# EAGLE board MCU Board (EAGLE 7.5.0)
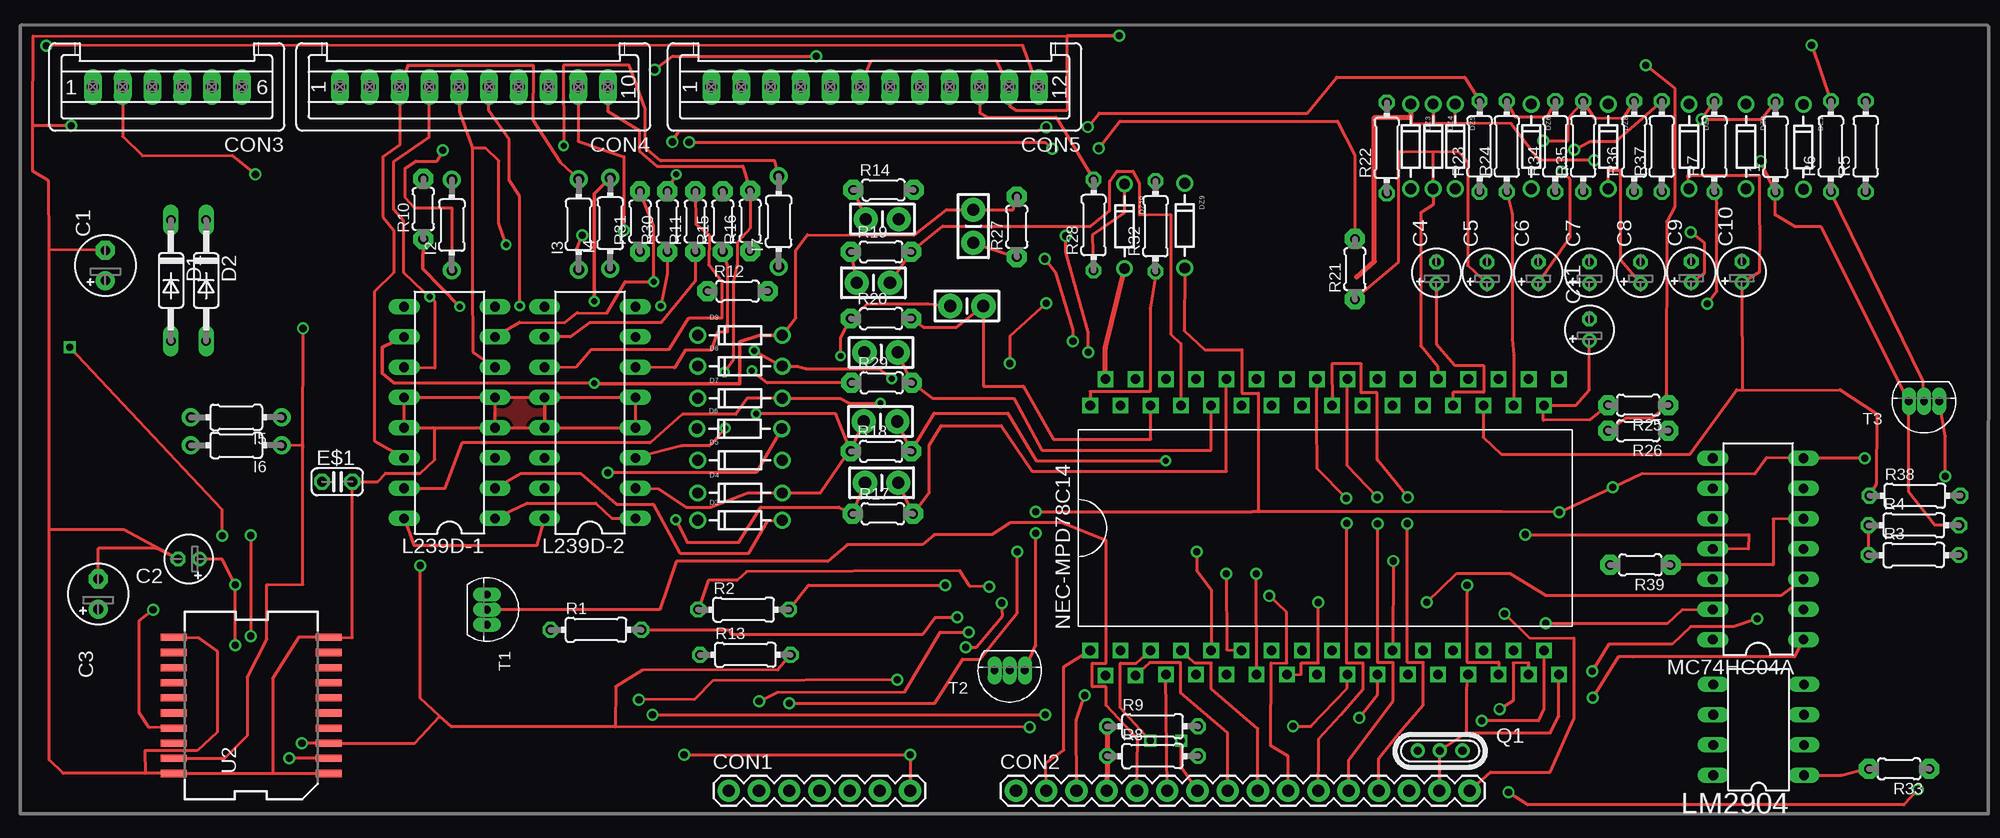
[diagram p0: board, top side]
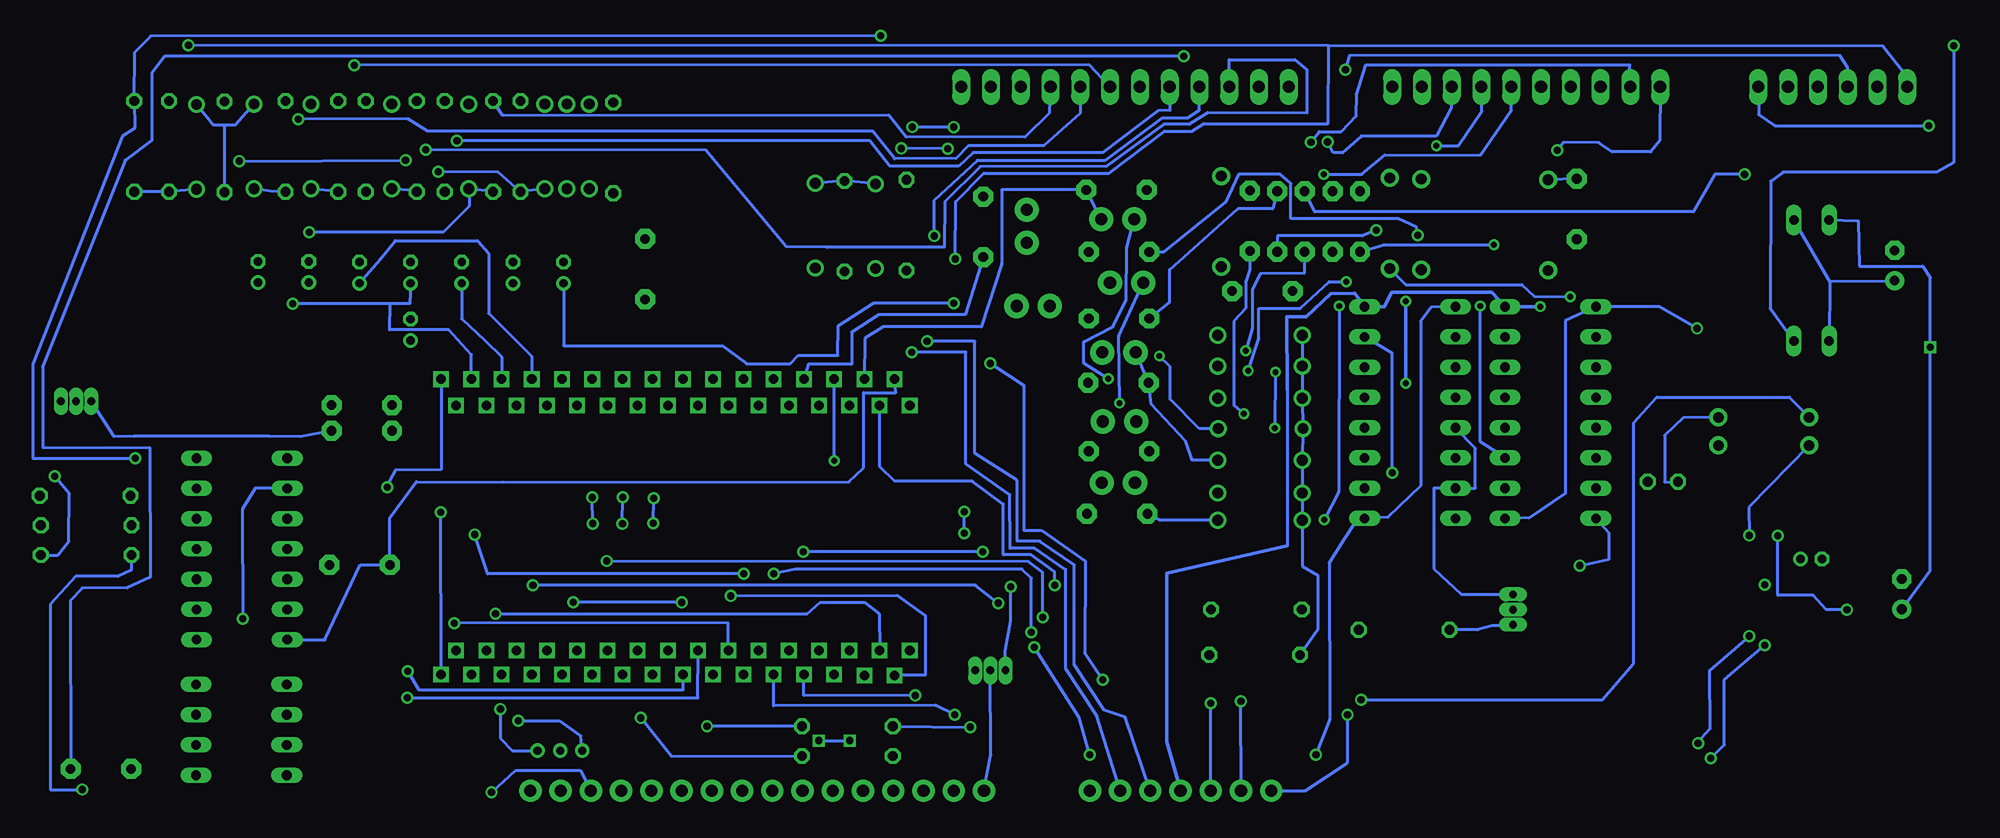
[diagram p1: board, bottom side, seen from below]

No outline drawn. Coordinates in mm, seen from the top.
Copper layers (1*16): Top 0.035mm / dielectric 1.5mm / Bottom 0.035mm
Design rules "default *": minimum track width 10mil, minimum drill 24mil, track to track 4mil, track to pad 4mil, pad to pad 8mil, via to via 8mil, smd to smd 8mil, copper to edge 40mil, drill to drill 8mil, minimum pad ring 10mil, minimum via ring 8mil, stop-mask expansion 4mil, vias tented up to drill 0mil, thermal gap 10mil

## Footprints (pad centres in the part's own frame; a part is rotated, then mirrored left to right if it is on the bottom)
E2,5-5 = drill 0.813 pad 1.6: + -1.27,0 | drill 0.813 pad 1.6 octagon: - 1.27,0
E1,8-4 = drill 0.711 pad 1.168: + -0.889,0 | drill 0.711 pad 1.168 octagon: - 0.889,0
1X07 = drill 1.016 pad 1.88: 1 0,0; 2 2.54,0; 3 5.08,0; 4 7.62,0; 5 10.16,0; 6 12.7,0; 7 15.24,0
1X16 = drill 1.016 pad 1.88: 1 0,0; 2 2.54,0; 3 5.08,0; 4 7.62,0; 5 10.16,0; 6 12.7,0; 7 15.24,0; 8 17.78,0; 9 20.32,0; 10 22.86,0; 11 25.4,0; 12 27.94,0; 13 30.48,0; 14 33.02,0; 15 35.56,0; 16 38.1,0
S06P = drill 1.016 long: 1 6.25,0; 2 3.75,0; 3 1.25,0; 4 -1.25,0; 5 -3.75,0; 6 -6.25,0
S10P = drill 1.016 long: 1 11.25,0; 2 8.75,0; 3 6.25,0; 4 3.75,0; 5 1.25,0; 6 -1.25,0; 7 -3.75,0; 8 -6.25,0; 9 -8.75,0; 10 -11.25,0
S12P = drill 1.016 long: 1 13.75,0; 2 11.25,0; 3 8.75,0; 4 6.25,0; 5 3.75,0; 6 1.25,0; 7 -1.25,0; 8 -3.75,0; 9 -6.25,0; 10 -8.75,0; 11 -11.25,0; 12 -13.75,0
DO35-10 = drill 0.813 long: A 5.08,0; C -5.08,0
DIODE-ZENER = drill 0.9: P$1 -3.556,0; P$2 3.556,0
C025-024X044 = drill 0.813 octagon: 1 -1.27,0; 2 1.27,0
CAP-PTH-SMALL-KIT = drill 1.016 pad 2.032: 1 -1.397,0; 2 1.397,0
0204/7 = drill 0.813 octagon: 1 -3.81,0; 2 3.81,0
TFI0204 = drill 0.9 pad 1.5: 1 -3.81,0; 2 3.81,0
DIL16 = drill 0.813 long: 1 -8.89,-3.81; 2 -6.35,-3.81; 3 -3.81,-3.81; 4 -1.27,-3.81; 5 1.27,-3.81; 6 3.81,-3.81; 7 6.35,-3.81; 8 8.89,-3.81; 9 8.89,3.81; 10 6.35,3.81; 11 3.81,3.81; 12 1.27,3.81; 13 -1.27,3.81; 14 -3.81,3.81; 15 -6.35,3.81; 16 -8.89,3.81
DIP08 = drill 0.813 long: 1 -3.81,-3.81; 2 -1.27,-3.81; 3 1.27,-3.81; 4 3.81,-3.81; 5 3.81,3.81; 6 1.27,3.81; 7 -1.27,3.81; 8 -3.81,3.81
DIL14 = drill 0.813 long: 1 -7.62,-3.81; 2 -5.08,-3.81; 3 -2.54,-3.81; 4 0,-3.81; 5 2.54,-3.81; 6 5.08,-3.81; 7 7.62,-3.81; 8 7.62,3.81; 9 5.08,3.81; 10 2.54,3.81; 11 0,3.81; 12 -2.54,3.81; 13 -5.08,3.81; 14 -7.62,3.81
P64GQ-100-36 = drill 0.8 square: P$1 -10.27,-1.02; P$2 -12.37,-2.29; P$3 -10.27,-3.56; P$4 -12.37,-4.83; P$5 -10.27,-6.1; P$6 -12.31,-7.37; P$7 -10.27,-8.64; P$8 -12.31,-9.91; P$9 -10.27,-11.18; P$10 -12.31,-12.45; P$11 -10.27,-13.72; P$12 -12.31,-14.99; P$13 -10.27,-16.26; P$14 -12.31,-17.53; P$15 -10.27,-18.8; P$16 -12.31,-20.07; P$17 -10.27,-21.34; P$18 -12.31,-22.61; P$19 -10.27,-23.88; P$20 -12.31,-25.15; P$21 -10.27,-26.42; P$22 -12.31,-27.69; P$23 -10.27,-28.96; P$24 -12.31,-30.23; P$25 -10.27,-31.5; P$26 -12.31,-32.77; P$27 -10.27,-34.04; P$28 -12.31,-35.31; P$29 -10.27,-36.58; P$30 -12.31,-37.85; P$31 -10.27,-39.12; P$32 -12.31,-40.39; P$33 12.5,-40.39; P$34 10.3,-39.12; P$35 12.5,-37.85; P$36 10.3,-36.58; P$37 12.5,-35.31; P$38 10.3,-34.04; P$39 12.5,-32.77; P$40 10.3,-31.5; P$41 12.5,-30.23; P$42 10.3,-28.96; P$43 12.5,-27.69; P$44 10.3,-26.42; P$45 12.5,-25.15; P$46 10.3,-23.88; P$47 12.5,-22.61; P$48 10.3,-21.34; P$49 12.5,-20.07; P$50 10.3,-18.8; P$51 12.5,-17.53; P$52 10.3,-16.26; P$53 12.5,-14.99; P$54 10.3,-13.72; P$55 12.5,-12.45; P$56 10.3,-11.18; P$57 12.5,-9.91; P$58 10.3,-8.64; P$59 12.5,-7.37; P$60 10.3,-6.1; P$61 12.5,-4.83; P$62 10.3,-3.56; P$63 12.5,-2.29; P$64 10.3,-1.02
UM5 = drill 0.7 pad 1.2: 1 -1.875,0; 2 -0.027,0; 3 1.875,0
0204/5 = drill 0.813 pad 1.676 octagon: 1 -2.54,0; 2 2.54,0
SOT54 = drill 0.66 pad 1.054 long: 1 1.27,0; 2 0,0; 3 -1.27,0
POWERSO-20 = smd 0.6 x 2.2: 1 -5.715,-6.5; 2 -4.445,-6.5; 3 -3.175,-6.5; 4 -1.905,-6.5; 5 -0.635,-6.5; 6 0.635,-6.5; 7 1.905,-6.5; 8 3.175,-6.5; 9 4.445,-6.5; 10 5.715,-6.5; 11 5.715,6.5; 12 4.445,6.5; 13 3.175,6.5; 14 1.905,6.5; 15 0.635,6.5; 16 -0.635,6.5; 17 -1.905,6.5; 18 -3.175,6.5; 19 -4.445,6.5; 20 -5.715,6.5

## Placement (x,y rotation side)
C1  [E2,5-5]  -62.6,15 90 top
C2  100nF  [E1,8-4]  -55.6,-9.65 180 top
C3  47uF  [E2,5-5]  -63.2,-12.6 90 top
C4  2.2uF  [E1,8-4]  49.2,14.4 90 top
C5  2.2uF  [E1,8-4]  53.45,14.4 90 top
C6  2.2uF  [E1,8-4]  57.75,14.4 90 top
C7  2.2uF  [E1,8-4]  62.05,14.4 90 top
C8  2.2uF  [E1,8-4]  66.35,14.4 90 top
C9  2.2uF  [E1,8-4]  70.6,14.45 90 top
C10  2.2uF  [E1,8-4]  74.85,14.45 90 top
C11  2.2uF  [E1,8-4]  62.05,9.6 90 top
CON1  [1X07]  -10.24,-29.12 0 top
CON2  [1X16]  13.89,-29.12 0 top
CON3  [S06P]  -57.4,30 180 top
CON4  [S10P]  -31.65,30 180 top
CON5  [S12P]  2.05,30 180 top
D1  [DO35-10]  -57.1,13.75 270 top
D2  [DO35-10]  -54.15,13.74 270 top
D3  [DIODE-ZENER]  -9.3,-6.4 0 top
D4  [DIODE-ZENER]  -9.3,-4.1 0 top
D5  [DIODE-ZENER]  -9.3,-1.35 0 top
D6  [DIODE-ZENER]  -9.35,1.3 0 top
D7  [DIODE-ZENER]  -9.3,3.85 0 top
D8  [DIODE-ZENER]  -9.3,6.55 0 top
D9  [DIODE-ZENER]  -9.3,9.15 0 top
DZ1  [DIODE-ZENER]  80.02,24.97 270 top
DZ2  [DIODE-ZENER]  75.2,25 270 top
DZ3  [DIODE-ZENER]  47.04,25 270 top
DZ4  [DIODE-ZENER]  48.92,25 270 top
DZ5  [DIODE-ZENER]  50.78,25 270 top
DZ6  [DIODE-ZENER]  57.15,25 270 top
DZ7  [DIODE-ZENER]  70.41,25 270 top
DZ8  [DIODE-ZENER]  63.63,25 270 top
DZ9  [DIODE-ZENER]  28.05,18.35 270 top
DZ10  [DIODE-ZENER]  23,18.3 270 top
E$1  [C025-024X044]  -43.13,-3.16 0 top
E$8  [CAP-PTH-SMALL-KIT]  2.65,18.9 0 top
E$9  [CAP-PTH-SMALL-KIT]  1.9,13.55 0 top
E$10  [CAP-PTH-SMALL-KIT]  2.55,7.7 0 top
E$11  [CAP-PTH-SMALL-KIT]  2.5,1.9 0 top
E$12  [CAP-PTH-SMALL-KIT]  2.6,-3.25 0 top
E$13  [CAP-PTH-SMALL-KIT]  9.75,11.6 0 top
E$14  [CAP-PTH-SMALL-KIT]  10.3,18.3 90 top
I1  16.5K  [0204/7]  77.68,24.97 90 top
I2  [TFI0204]  -33.5,18.4 90 top
I3  [TFI0204]  -22.85,18.45 90 top
I4  [TFI0204]  -20.2,18.55 90 top
I5  [TFI0204]  -51.61,2.25 180 top
I6  [TFI0204]  -51.61,-0.11 180 top
I7  [TFI0204]  -6.05,18.7 90 top
L239D-1  AirDistMotor & AirCock&BlendMotor  [DIL16]  -33.7,2.65 90 top
L239D-2  AirIntakeMotor & ThreeLevelPressureSW  [DIL16]  -21.9,2.65 90 top
LM2904  LM2904  [DIP08]  76.25,-24 90 top
MC74HC04A  [DIL14]  76.22,-8.8 90 top
NEC-MPD78C14  mPD78C14  [P64GQ-100-36]  19.1,-7.05 90 top
Q1  8MHz  [UM5]  49.5,-25.75 0 top
R1  330  [0204/7]  -21.4,-15.6 0 top
R2  330  [0204/7]  -9,-13.9 0 top
R3  82K  [0204/7]  89.3,-9.32 0 top
R4  12K  [0204/7]  89.3,-6.82 0 top
R5  22K  [0204/7]  85.25,25 90 top
R6  22K  [0204/7]  82.33,25 90 top
R7  22K  [0204/7]  72.55,25 90 top
R8  8.2K  [0204/7]  25.35,-26.2 0 top
R9  8.2K  [0204/7]  25.35,-23.7 0 top
R10  5K7  [0204/5]  -35.9,19.75 90 top
R11  8K2  [0204/5]  -13.05,18.7 90 top
R12  8K2  [0204/5]  -9.5,12.85 0 top
R13  180  [0204/7]  -8.85,-17.7 0 top
R14  22K  [0204/5]  2.75,21.35 0 top
R15  8K2  [0204/5]  -10.75,18.7 90 top
R16  8K2  [0204/5]  -8.45,18.75 90 top
R17  22K  [0204/5]  2.7,-5.85 0 top
R18  22K  [0204/5]  2.55,-0.6 0 top
R19  22K  [0204/5]  2.55,16.15 0 top
R20  22K  [0204/5]  2.55,10.55 0 top
R21  22K  [0204/5]  42.35,14.7 90 top
R22  8K2  [0204/7]  45.02,24.88 90 top
R23  22K  [0204/7]  52.82,25 90 top
R24  22K  [0204/7]  55.11,25 90 top
R25  22K +/-5%  [0204/5]  66.15,3.27 180 top
R26  1500  [0204/5]  66.15,1.12 180 top
R27  22K  [0204/5]  13.95,18.25 90 top
R28  22K  [0204/7]  20.4,18.4 90 top
R29  22K  [0204/5]  2.6,5.15 0 top
R30  8K2  [0204/5]  -15.4,18.7 90 top
R31  8K2  [0204/5]  -17.7,18.7 90 top
R32  8K2  [0204/7]  25.6,18.3 90 top
R33  22K  [0204/5]  88.06,-27.28 180 top
R34  3.92k  [0204/7]  59.18,25 90 top
R35  22K  [0204/7]  61.52,25 90 top
R36  3.92K  [0204/7]  65.8,25 90 top
R37  22.1K  [0204/7]  68.12,25 90 top
R38  12K  [0204/7]  89.39,-4.34 0 top
R39  22K  [0204/5]  66.32,-10.14 180 top
T1  LCD Vel.  [SOT54]  -30.55,-13.9 270 top
T2  LCD Temp  [SOT54]  13.35,-19 180 top
T3  Bright Ctrl.  [SOT54]  90.15,3.6 180 top
U2  ST-L4947PD  [POWERSO-20]  -50.35,-21.95 90 top

## Library data of the parts
C1-C3 D1 D2 R10-R12 R14-R21 R25-R27 R29-R31 R33 R39 = adafruit
C4-C11 = ref-packages
CON1 CON2 = SparkFun-Connectors
CON3-CON5 = con-amp-mt
D3-D9 DZ1-DZ10 = SparkFun-DiscreteSemi
E$1 I1-I7 R5-R7 R22-R24 R28 R32 R34-R37 = rcl
E$8-E$11 E$13 E$14 = SparkFun-Passives
E$12 = SparkFun-Capacitors
L239D-1 L239D-2 = texas
LM2904 = motorola-sensor-driver
MC74HC04A = 74ac-logic
NEC-MPD78C14 = SOT185-1
Q1 = crystal
R1-R4 R8 R9 R13 R38 = resistor
T1-T3 = NXP_60_26022015
U2 = st-microelectronics

## Nets
[CON1.1]=MPD78C14.PB1->PCF2112_LCD_DRIVER.CLOCK_BUSTER: CON1.1 NEC-MPD78C14.P$10
[CON1.2]=MPD78C14.PB2->PCF2112_LCD_DRIVER.DATA: CON1.2 NEC-MPD78C14.P$11
[CON1.3]=MPD78C14.PB0->PCF2112_LCD_DRIVER.DATA_ENABLE: CON1.3 NEC-MPD78C14.P$9
[CON1.4][4.1]LCD_BULB_+12V-L293D_HBRIDGE_DRIVER.VCC2: CON1.4 L239D-1.8 L239D-2.8 R10.1
[CON1.6][CON5.4]=LUZ_PRINCIPAL_GND: CON1.6 CON5.4
[CON2.1]=NPN_LCD_TEMP_BULB.COLLECTOR->GND: CON2.1 T2.2
[CON2.2]=MPD78C14.PA0->KEYPAD.ROW0: CON2.2 NEC-MPD78C14.P$1
[CON2.3]=MPD78C14.PA7->KEYPAD.COL3: CON2.3 NEC-MPD78C14.P$8
[CON2.5]=NPN_LCD_SPEED_BULB.COLLECTOR->GND: CON2.5 T1.2
[CON2.6]=MPD78C14.PA5->KEYPAD.COL1: CON2.6 NEC-MPD78C14.P$6
[CON2.7]=MPD78C14.PA4->KEYPAD.COL0: CON2.7 NEC-MPD78C14.P$5
[CON2.8]=MPD78C14.PA3->KEYPAD.ROW3: CON2.8 NEC-MPD78C14.P$4
[CON2.9]=MPD78C14.PA6->KEYPAD.COL2: CON2.9 NEC-MPD78C14.P$7
[CON2.10]=MPD78C14.PA1->KEYPAD.ROW1: CON2.10 NEC-MPD78C14.P$2
[CON2.10]=MPD78C14.PF2->MM5481_LED_DRIVER.DATA_ENABLED: CON2.11 NEC-MPD78C14.P$49
[CON2.10][CON3.1]=NPN_BRIGHT_CTL.COLLECTOR->MM5481M_LED_DRIVER.BRIGHT_CONTROL(LUZ_PPL_V+): CON2.14 R3.1 R4.1
[CON2.12]=MPD78C14.PF0->MM5481_LED_DRIVER.DATA: CON2.12 NEC-MPD78C14.P$47
[CON2.13]=MPD78C14.PF1->MM5481_LED_DRIVER.CLOCK_IN: CON2.13 NEC-MPD78C14.P$48
[CON2.16]=MPD78C14.PA2->KEYPAD.ROW2: CON2.16 NEC-MPD78C14.P$3
[CON3.1]->[CON1.5]=LUZ_PRINCIPAL_+12V: CON1.5 CON3.1 R6.2
[CON3.2]=L239D.3Y->THREE_LVL_PRESSURE_SW: CON3.2 L239D-2.11 R11.2
[CON3.3]=ELECTRONIC_SPEED_REG<-LM2904.1OUT: CON3.3 R33.1
[CON4.1]=LUZ_LCD_+12V: CON4.1 I2.1
[CON4.2]=COCK_BLEND_MOTOR_POT->MPD78C14.AN7: CON4.2 R21.2
[CON4.3]=L239D.4Y->AIR_COCK_BLEND_MOTOR_NEG-: CON4.3 I3.2 L239D-1.14
[CON4.4]=L239D.3Y->AIR_COCK_BLEND_MOTOR_POS+: CON4.4 I4.1 L239D-1.11
[CON4.5]=L239D.2Y->AIR_DISTR_MOTOR_NEG-: CON4.5 L239D-1.6 R31.1
[CON4.6]=L239D.1Y->AIR_DISTR_MOTOR_POS+: CON4.6 L239D-1.3 R30.2
[CON4.7]=AIR_COCK_BLEND_MOTOR-AIR_DIST_MOTOR-POT(+5V): CON4.7 I7.2
[CON4.8]=AIR_DISTR_MOTOR_POT->MPD78C14.AN3: CON4.8 R23.2
[CON4.9]=L239D.2Y->AIR_INTAKE_MOTOR_POS+: CON4.9 L239D-2.6 R15.1
[CON4.10]=L239D.1Y->AIR_INTAKE_MOTOR_NEG-: CON4.10 L239D-2.3 R16.2
[CON5.3]=ELECTR_SPEED_REG_NTC->MPD78C14.AN4: CON5.3 R37.2
[CON5.5]=->TOP_BLENDED_AIR_TEMP_SENSOR->MPD78C14.AN5: CON5.5 R35.2 R36.2
[CON5.6]=COMMON_GND: C1.- C2.- C3.- CON2.15 CON3.6 CON5.6 CON5.11 DZ9.P$2 E$1.2 L239D-1.4 L239D-1.5 L239D-1.12 L239D-1.13 L239D-2.4 L239D-2.5 L239D-2.12 L239D-2.13 L239D-2.15 MC74HC04A.7 NEC-MPD78C14.P$26 NEC-MPD78C14.P$32 NEC-MPD78C14.P$33 Q1.2 R5.2 T1.3 T2.3 U2.1 U2.10 U2.11 U2.20
[CON5.9]=->BOTTOM_BLENDED_AIR_TEMP_SENSOR->MPD78C14.AN2: CON5.9 R24.2 R34.2
[CON5.10]=RADIO(+12V)->MPD78C14.VDD(+5V): CON5.10 R28.2
[CON5.12]=POWER_SUPPLIE(12V+): CON5.12 D2.A
CON5.7[BL].PASSENGER_COMPARTMENT_TEMP_SENSOR->MPD78C14.AN0: CON5.7 R25.1 R26.2
CON5.8[B].OUTSIDE_MIRROR_TEMP_SENSOR->MPD78C14.AN1: CON5.8 I1.2 R7.2
L239D.A1<-MPD78C14.PD0: D3.P$2 E$12.1 L239D-1.2 R17.1 R30.1
L239D.A1<-MPD78C14.PD4: D4.P$2 E$11.1 L239D-2.2 R16.1 R18.1
L239D.A2<-MPD78C14.PD1: D5.P$2 E$10.1 L239D-1.7 R29.1 R31.2
L239D.A2<-MPD78C14.PD2: E$14.1 NEC-MPD78C14.P$57 R27.1
L239D.A2<-MPD78C14.PD5: D6.P$2 E$13.1 L239D-2.7 R15.2 R20.1
L239D.A3<-MPD78C14.PD2: D9.P$2 E$14.2 I4.2 L239D-1.10 R27.2
L239D.A3<-MPD78C14.PD6: D8.P$2 E$8.1 L239D-2.10 R11.1 R14.1
L239D.A4<-MPD78C14.PD3: D7.P$2 E$9.1 I3.1 L239D-1.15 R19.1
L4947_VOLTAGE_REG.DELAYCAP: C2.+ U2.2
L4947_VOLTAGE_REG.RESET(+5V): CON1.7 I6.1 L239D-1.1 L239D-1.9 L239D-2.1 L239D-2.9 NEC-MPD78C14.P$28 U2.19
L4947_VOLTAGE_REG.VIN: C3.+ D1.C U2.17
L4947_VOLTAGE_REG.VOUT(+5V): CON2.4 I6.2 L239D-1.16 L239D-2.16 R8.1 R9.1 R13.2 U2.3
L4947_VOLTAGE_REG.VOUT->MPD78C14.STOP: DZ1.P$1 DZ2.P$1 DZ3.P$1 DZ4.P$1 DZ5.P$1 I1.1 R4.2 R26.1 T3.1
LM2904.1OUT: LM2904.1 R33.2
MPD78C14.AN0: C11.+ NEC-MPD78C14.P$34 R25.2
MPD78C14.AN1: C7.+ DZ2.P$2 NEC-MPD78C14.P$35 R7.1
MPD78C14.AN2: C9.+ DZ6.P$2 NEC-MPD78C14.P$36 R24.1
MPD78C14.AN3: C6.+ DZ5.P$2 NEC-MPD78C14.P$37 R23.1
MPD78C14.AN4: C10.+ DZ7.P$2 NEC-MPD78C14.P$38 R37.1 R38.1
MPD78C14.AN5: C8.+ DZ8.P$2 NEC-MPD78C14.P$39 R35.1
MPD78C14.AN6: C4.+ I5.2 NEC-MPD78C14.P$40
MPD78C14.AN7: C5.+ DZ4.P$2 NEC-MPD78C14.P$41 R21.1
MPD78C14.PB3->MC74HC04A.A5: MC74HC04A.11 NEC-MPD78C14.P$12
MPD78C14.PB4->MC74HC04A.A6: MC74HC04A.13 NEC-MPD78C14.P$13
MPD78C14.PB5->MC74HC04A.A2: MC74HC04A.3 NEC-MPD78C14.P$14
MPD78C14.PB6->MC74HC04A.A1: MC74HC04A.1 NEC-MPD78C14.P$15
MPD78C14.PB7->MC74HC04A.A4: MC74HC04A.9 NEC-MPD78C14.P$16
MPD78C14.PC4->NPN_LCD_SPEED_BULB.BASE: NEC-MPD78C14.P$21 R1.2
MPD78C14.PD0->L239D.A1: E$12.2 NEC-MPD78C14.P$55 R17.2
MPD78C14.PD1->L239D.A2: E$10.2 NEC-MPD78C14.P$56 R29.2
MPD78C14.PD3->L239D.A4: E$9.2 NEC-MPD78C14.P$58 R19.2
MPD78C14.PD4->L239D.A1: E$11.2 NEC-MPD78C14.P$59 R18.2
MPD78C14.PD5->L239D.A2: E$13.2 NEC-MPD78C14.P$60 R20.2
MPD78C14.PD6->L239D.A3: E$8.2 NEC-MPD78C14.P$61 R14.2
MPD78C14.PD7->NPN_LCD_TEMP_BULB.BASE: NEC-MPD78C14.P$62 R2.2
MPD78C14.VDD(+5V)->MC74HC04A.A3: MC74HC04A.5 R39.1
MPD78C14.VDD(+5V)<-RADIO(+12V): NEC-MPD78C14.P$64 R32.1
MPD78C14.X1: NEC-MPD78C14.P$30 Q1.3
MPD78C14.X2: NEC-MPD78C14.P$31 Q1.1
NPN_BRIGHT_CTL.COLLECTOR(LUZ_PPL_V+): R3.2 T3.3
NPN_LCD_SPEED_BULB.BASE: R1.1 T1.1
NPN_LCD_TEMP_BULB.BASE: R2.1 T2.1
PC1/RXD: NEC-MPD78C14.P$18 R9.2
PC3/INT2: NEC-MPD78C14.P$20 R8.2
RADIO(+12V)->MPD78C14.VDD(+5V): DZ9.P$1 DZ10.P$1 R28.1 R32.2
RADIO(+12V)->MPD78C14.VDD(+5V)->MPD78C14.STOP: DZ10.P$2 MC74HC04A.14 NEC-MPD78C14.P$63 R39.2
S$4: DZ1.P$2 R5.1 R6.1 T3.2
S$7: C1.+ D1.A D2.C
S$8: E$1.1 I5.1
S$10: D3.P$1 D4.P$1 D5.P$1 D6.P$1 D7.P$1 D8.P$1 D9.P$1 R13.1
S$28: I2.2 R10.2

## Tracks (layer width: path | path; a pad name or v marks a point on that pad's centre or on a via)
[CON1.1]=MPD78C14.PB1->PCF2112_LCD_DRIVER.CLOCK_BUSTER  (via drill 0.6)
  Top 0.254: v-16.65,-22.73 v16.35,-22.73
  Bottom 0.254: CON1.1 -13.1,-29.1 -16.65,-26.75 v-16.65,-22.73 | v16.35,-22.73 17.99,-21.94 31.55,-21.99 NEC-MPD78C14.P$10
[CON1.2]=MPD78C14.PB2->PCF2112_LCD_DRIVER.DATA  (via drill 0.6)
  Top 0.254: v-7.7,-21.59 -6.16,-20.82 4.55,-20.81 7.5,-15.8 v9.9,-15.8 | v31.53,-10.9 31.57,-17.27 NEC-MPD78C14.P$11
  Bottom 0.254: CON1.2 v-7.7,-21.59 | v9.9,-15.8 9.9,-11.25 10.7,-10.5 29.75,-10.5 v31.53,-10.9
[CON1.3]=MPD78C14.PB0->PCF2112_LCD_DRIVER.DATA_ENABLE  (via drill 0.6)
  Top 0.254: v-5.15,-21.77 7.05,-21.77 8.3,-19.8 9.4,-18.05 10.85,-18.05 14,-14.15 v14,-9.05 | v29.05,-9.05 29.05,-10.6 30.3,-12.25 NEC-MPD78C14.P$9
  Bottom 0.254: CON1.3 v-5.15,-21.77 | v14,-9.05 v29.05,-9.05
[CON1.4][4.1]LCD_BULB_+12V-L293D_HBRIDGE_DRIVER.VCC2  (via drill 0.5 pad 0.25)
  Top 0.305: R10.1 -35.95,14.75 v-32.85,11.55
  Bottom 0.254: -11.6,4.55 -11.6,-8.55
  Bottom 0.305: -11.6,4.55 -11.55,10.7 -13.2,10.7 -15.25,12.65 -17.24,12.66 L239D-2.8 -19.75,11.55 -20.35,12.75 -28.75,12.75 L239D-1.8 v-32.85,11.55 | -11.6,-8.55 -1.46,-10.85 -1.48,-25 CON1.4
[CON1.6][CON5.4]=LUZ_PRINCIPAL_GND  (via drill 0.6)
  Top 0.254: v19.94,7.71 19.96,9.38 18.07,16.16 v18.05,17.48
  Bottom 0.254: CON1.6 4.4,-22.8 7,-18.85 7,-10.55 9.6,-8.75 11.7,-8.75 11.7,-4.25 15.4,-1.65 15.4,7.73 v19.94,7.71 | v18.05,17.48 18.04,20.49 14.42,23.86 3.69,23.86 -1.08,27.39 -3.24,27.39 -4.21,28.06 -4.2,29.75 CON5.4
[CON2.1]=NPN_LCD_TEMP_BULB.COLLECTOR->GND
  Bottom 0.254: CON2.1 13.3,-26.1 T2.2
[CON2.2]=MPD78C14.PA0->KEYPAD.ROW0
  Top 0.254: CON2.2 16.4,-26.8 17.9,-25.7 17.9,-18.7 NEC-MPD78C14.P$1
[CON2.3]=MPD78C14.PA7->KEYPAD.COL3  (via drill 0.6)
  Top 0.254: CON2.3 18.95,-23.2 v19.66,-21.11
  Bottom 0.254: v19.66,-21.11 29.01,-21.12 NEC-MPD78C14.P$8
[CON2.5]=NPN_LCD_SPEED_BULB.COLLECTOR->GND
  Top 0.254: CON2.5 24.1,-24.8 21.45,-21.95 21.45,-20.4 20.3,-20.4 20.3,-18.4 21.45,-18.4 21.45,-8.1 17.7,-6.59 13.4,-6.59 11.85,-7.6 7,-7.6 6,-8.45 -0.3,-8.45 -1.95,-9.85 -14.65,-9.85 -16.05,-13.9 T1.2
[CON2.6]=MPD78C14.PA5->KEYPAD.COL1
  Top 0.254: CON2.6 NEC-MPD78C14.P$6
[CON2.7]=MPD78C14.PA4->KEYPAD.COL0  (via drill 0.6)
  Top 0.254: CON2.7 27.75,-27.15 v27.75,-24.9 | v25.15,-24.9 22.65,-22.15 22.65,-18.4 24,-18.4 NEC-MPD78C14.P$5
  Bottom 0.254: v27.75,-24.9 v25.15,-24.9
[CON2.8]=MPD78C14.PA3->KEYPAD.ROW3
  Top 0.254: CON2.8 31.65,-24.25 27.7,-20.9 27.7,-18.35 25.1,-18.35 NEC-MPD78C14.P$4
[CON2.9]=MPD78C14.PA6->KEYPAD.COL2
  Top 0.254: CON2.9 34.2,-23.9 30.3,-20.55 30.3,-18.4 28.9,-18.4 NEC-MPD78C14.P$7
[CON2.10]=MPD78C14.PA1->KEYPAD.ROW1  (via drill 0.6)
  Top 0.254: CON2.10 36.75,-26.2 35.3,-25.35 35.31,-18.39 36.63,-18.37 36.62,-14.1 v35.15,-12.75
  Bottom 0.254: v35.15,-12.75 21.2,-12.7 18.8,-14.4 18.8,-19.4 NEC-MPD78C14.P$2
[CON2.10]=MPD78C14.PF2->MM5481_LED_DRIVER.DATA_ENABLED  (via drill 0.6)
  Top 0.254: CON2.11 39.3,-26 39.3,-24.75 41.15,-22.75 43.05,-20.55 43.05,-18.4 41.65,-18.4 v41.65,-6.64 | v41.63,-4.54 39.18,-2.05 39.15,1.95 39.15,4.6 NEC-MPD78C14.P$49
  Bottom 0.254: v41.65,-6.64 v41.63,-4.54
[CON2.10][CON3.1]=NPN_BRIGHT_CTL.COLLECTOR->MM5481M_LED_DRIVER.BRIGHT_CONTROL(LUZ_PPL_V+)  (via drill 0.6)
  Top 0.254: R3.1 R4.1 | v89.63,-29.01 88.45,-30.31 56.86,-30.31 v55.25,-29.25
  Bottom 0.254: R3.1 85.49,-10.58 86.61,-11.11 90.18,-11.11 92.3,-13.43 92.31,-29.03 v89.63,-29.01 | v55.25,-29.25 53.2,-27.4 47.8,-27.4 CON2.14
[CON2.12]=MPD78C14.PF0->MM5481_LED_DRIVER.DATA  (via drill 0.6)
  Top 0.254: CON2.12 41.85,-26.5 45.55,-21.55 45.55,-18.35 44.25,-18.35 v44.25,-6.68 | v44.23,-4.45 41.72,-1.8 41.7,0.72 41.7,4.3 NEC-MPD78C14.P$47
  Bottom 0.254: v44.25,-6.68 v44.23,-4.45
[CON2.13]=MPD78C14.PF1->MM5481_LED_DRIVER.CLOCK_IN  (via drill 0.6)
  Top 0.254: CON2.13 44.35,-26.4 46.05,-24.3 48.1,-21.9 48.1,-18.35 46.75,-18.35 v46.75,-6.67 | v46.78,-4.48 44.21,-1.32 44.21,4.3 42.9,4.3 42.9,6.75 40.41,6.75 NEC-MPD78C14.P$48
  Bottom 0.254: v46.75,-6.67 v46.78,-4.48
[CON2.16]=MPD78C14.PA2->KEYPAD.ROW2  (via drill 0.6)
  Top 0.254: CON2.16 53.75,-27.55 58.75,-27.55 60.73,-23.1 60.74,-16.29 57,-16.27 v54.91,-14.24
  Bottom 0.254: v54.91,-14.24 28.73,-14.26 27.65,-13.3 23.95,-13.3 22.7,-14.25 NEC-MPD78C14.P$3
[CON3.1]->[CON1.5]=LUZ_PRINCIPAL_+12V  (via drill 0.6)
  Top 0.254: v80.7,33.5 R6.2 | v18.66,8.65 18.68,9.6 17.28,14.29 v16.31,15.55
  Bottom 0.254: CON3.1 -63.65,30.8 -61.62,33.43 -15.05,33.46 | -15.05,33.46 v80.7,33.5 | CON1.5 2,-22.95 3.8,-22.35 6.3,-18.55 6.3,-10.15 9.2,-8.15 11.1,-8.15 11.1,-3.05 14.65,-0.75 14.65,8.63 v18.66,8.65 | v16.31,15.55 16.26,20.37 13.9,22.77 3.34,22.77 -1.29,26.28 -3.55,26.27 -4.57,26.93 -15.02,26.92 -15.05,33.46
[CON3.2]=L239D.3Y->THREE_LVL_PRESSURE_SW  (via drill 0.6)
  Top 0.254: CON3.2 -61.15,25.85 -59.48,24.22 -51.98,24.25 v-50,22.65 | L239D-2.11 -23.06,6.49 -21.8,7.95 -15.25,7.95 -13.6,10.6 -10.8,10.6 -10.8,13.6 -11.94,15.06 -11.9,17.55 -13,18.45 R11.2
  Bottom 0.254: v-50,22.65 -47.5,22.65 -45.7,19.5 -13.9,19.5 R11.2
[CON3.3]=ELECTRONIC_SPEED_REG<-LM2904.1OUT  (via drill 0.6)
  Top 0.254: v-16.48,31.43 -14.94,32.59 v-2.89,32.58
  Bottom 0.254: CON3.3 -58.65,31.63 -57.99,32.65 -16.82,32.64 v-16.48,31.43 | v-2.89,32.58 82.69,32.56 83.77,31.14 83.78,25.5 86.03,23.86 92.94,6.53 92.93,-0.29 87.11,-0.28 83.96,-0.29 83.93,-11.2 85.84,-12.09 89.64,-12.09 90.62,-13.15 R33.1
[CON4.1]=LUZ_LCD_+12V  (via drill 0.6)
  Top 0.254: I2.1 -33.5,19.85 -36.65,19.85 -37.45,20.75 -37.45,23.15 -36.5,23.77 -34.75,23.77 -34.26,24.65 v-34.25,24.67
  Bottom 0.254: CON4.1 -42.87,25.5 -42.12,24.55 -38.9,24.55 -37.77,25.32 -34.8,25.35 v-34.25,24.67
[CON4.2]=COCK_BLEND_MOTOR_POT->MPD78C14.AN7  (via drill 0.6)
  Top 0.254: v-13.58,25.34 16.36,25.36 v16.94,24.81 | R21.2 42.35,24.25 40.87,27.13 22.61,27.13 v20.83,24.83
  Bottom 0.254: CON4.2 -40.37,31.84 -18.15,31.84 -17.38,29.39 -17.36,27.53 -16.11,26.25 -14.27,26.25 v-13.58,25.34 | v16.94,24.81 v20.83,24.83
[CON4.3]=L239D.4Y->AIR_COCK_BLEND_MOTOR_NEG-
  Top 0.254: L239D-1.14 -40,0.3 -40,12.8 -38.4,14.4 -38.4,17.95 -39.3,19.1 -39.3,24.15 -37.9,25.14 CON4.3 -37.21,31.78 -26.63,31.78 -26.64,27.19 -24.38,23.64 I3.2
[CON4.4]=L239D.3Y->AIR_COCK_BLEND_MOTOR_POS+  (via drill 0.5 pad 0.25)
  Top 0.254: L239D-1.11 -34.9,6.4 -34.9,11.95 v-35.37,12.38 -35.87,12.78 -37.55,14.4 -37.55,18.7 -38.4,19.7 -38.4,23.7 -35.41,25.77 CON4.4
  Bottom 0.254: I4.1 -21.55,13.4 -31.3,13.4 -32.35,12.4 v-35.37,12.38
[CON4.5]=L239D.2Y->AIR_DISTR_MOTOR_NEG-  (via drill 0.5 pad 0.25)
  Top 0.254: v-28.95,16.75 -29.55,18.55 -29.55,23.8 -30.65,24.85 -31.75,24.85 | -31.75,24.85 -31.75,24.9 -32.86,27.98 CON4.5 | L239D-1.6 -31.7,7.7 -31.75,13.85 -31.75,24.85
  Bottom 0.254: R31.1 -19.7,16.75 v-28.95,16.75
[CON4.6]=L239D.1Y->AIR_DISTR_MOTOR_POS+  (via drill 0.5 pad 0.25)
  Top 0.254: v-27.8,11.6 -27.8,20.8 -28.7,22.15 -28.7,25.58 -30.42,28 CON4.6 | R30.2 v-14.65,22.65
  Bottom 0.254: L239D-1.3 -27.8,0.2 v-27.8,11.6 | v-14.65,22.65 -17.85,22.65 -19.8,24.29 -27.8,24.27 -30.42,28.03 CON4.6
[CON4.7]=AIR_COCK_BLEND_MOTOR-AIR_DIST_MOTOR-POT(+5V)  (via drill 0.5 pad 0.25)
  Top 0.254: I7.2 -6.4,23.8 -15.95,23.8 -17.25,24.9 -17.25,28.15 -18.61,31.84 -24.13,31.82 v-24.12,25.06
  Bottom 0.254: v-24.12,25.06 -25.94,25.06 -27.93,27.95 CON4.7
[CON4.8]=AIR_DISTR_MOTOR_POT->MPD78C14.AN3  (via drill 0.6)
  Top 0.254: v-14.97,25.38 -14.46,26.28 15.66,26.31 v16.43,26.63 | v19.9,26.64 20.88,27.81 38.36,27.8 40.82,30.82 51.57,30.82 R23.2
  Bottom 0.254: CON4.8 -25.38,28.24 -24.08,25.86 -17.8,25.86 -16.22,24.46 -15.47,24.48 v-14.97,25.38 | v16.43,26.63 v19.9,26.64
[CON4.9]=L239D.2Y->AIR_INTAKE_MOTOR_POS+  (via drill 0.6)
  Top 0.254: CON4.9 -22.9,25.45 -19.05,24.15 v-19.05,17.95 | R15.1 -10.35,15 -10.35,9.4 -11.2,9.4 -11.7,7.9 -13.9,7.9 -14.8,6.4 L239D-2.6
  Bottom 0.254: v-19.05,17.95 -17.9,17.5 -10.75,17.5 R15.1
[CON4.10]=L239D.1Y->AIR_INTAKE_MOTOR_NEG-  (via drill 0.5 pad 0.25)
  Top 0.254: CON4.10 -20.41,27.96 -17.75,26.35 -17.75,24.6 -16.3,23.35 -9.05,23.35 R16.2 -8.45,18.15 -9.55,16.9 -9.55,15.05 -9.85,13.65 -9.85,7.05 v-10.6,6.05 | v-10.55,1.35 -11.85,-0.15 -14.2,-0.15 L239D-2.3
  Bottom 0.254: v-10.6,6.05 v-10.55,1.35
[CON5.3]=ELECTR_SPEED_REG_NTC->MPD78C14.AN4  (via drill 0.6)
  Top 0.254: R37.2 64.23,25.4 62.02,25.38 v60.77,24.72
  Bottom 0.254: CON5.3 -6.71,32.3 -12.22,32.3 -13.24,31.46 -13.24,27.8 -4.91,27.82 -3.38,26.86 -1.22,26.86 3.63,23.32 14.21,23.32 17.17,20.36 17.2,16.54 27.07,16.53 30.51,16.58 37.24,24.7 v60.77,24.72
[CON5.5]=->TOP_BLENDED_AIR_TEMP_SENSOR->MPD78C14.AN5  (via drill 0.6)
  Top 0.254: v58.15,25.49 60.26,25.49 60.28,27.36 R35.2 62.45,27.38 64.95,27.4 R36.2
  Bottom 0.254: CON5.5 -1.72,28.03 -0.73,28.01 3.95,24.47 7.52,24.48 14.8,24.48 16.01,23.34 21.79,23.35 23.5,25.5 v58.15,25.49
[CON5.6]=COMMON_GND  (via drill 0.6)  (1 unrouted)
  Top 0.254: v15.55,-5.69 33.71,-5.69 34.25,-5.69 | T2.3 15.55,-16.9 v15.55,-7.5 | NEC-MPD78C14.P$32 59.49,-22.86 58.77,-24.25 51.75,-24.25 | NEC-MPD78C14.P$26 51.75,-20.61 51.75,-24.25 | 51.75,-24.25 Q1.2 49.47,-29.12 CON2.15 | DZ9.P$2 28.01,9.54 29.73,7.93 32.86,7.93 32.86,4.29 34.24,4.29 34.25,-5.69 | CON5.6 1.72,32.19 12.18,32.23 CON5.11 13.34,28.38 13.89,28.04 18.18,28.04 18.15,34.28 v22.55,34.3 -68.67,34.27 -68.7,26.74 | -68.7,26.74 -68.7,22.91 -67.36,22.11 -67.33,16.31 | C3.- -63.2,-8.75 -58.35,-8.75 C2.- -61.04,-7.19 -67.3,-7.19 | -59.26,-27.66 U2.20 -48.56,-27.66 | -59.26,-27.66 -66.15,-27.65 -67.34,-26.52 -67.3,-7.19 | -48.56,-27.66 U2.1 | -48.56,-27.66 -48.56,-19.67 -46.37,-16.22 U2.10 -41.86,-16.26 -41.86,-4.87 E$1.2 -39.73,-3.16 -39.08,-2.44 -36.14,-2.44 -34.93,-1.3 -34.93,1.23 -35.09,1.38 | -67.3,-7.19 -67.33,16.31 | C1.- -67.33,16.31 | U2.11 -54.82,-16.25 -53.22,-17.4 -53.2,-24.19 -54.9,-25.74 -59.29,-25.74 -59.26,-27.66 | L239D-1.5 L239D-1.12 L239D-1.13 -35.09,1.38 | L239D-1.5 L239D-1.4 L239D-2.13 | L239D-1.5 L239D-2.12 | L239D-2.13 L239D-2.4 | -35.09,1.38 -31.4,1.39 L239D-1.4 | L239D-2.13 | L239D-2.12 L239D-2.13 | L239D-2.13 -25.7,3.9 | v-65.47,26.74 -68.7,26.74 | 34.25,-5.69 54.72,-5.68 v59.53,-5.72 v64,-3.63 | v85.19,-1.19 MC74HC04A.7 76.91,-1.14 75.95,-2.5 66.5,-2.47 v64,-3.63 | v64,-3.63 63.93,-3.67 | L239D-2.12 L239D-2.5 | L239D-2.5 | L239D-2.5 -18.1,1.36
  Bottom 0.254: v22.55,34.3 83.89,34.27 85.23,32.91 R5.2 85.24,26.53 86.25,25.86 93.78,6.72 93.77,-1.2 v85.19,-1.19 | v15.55,-7.5 v15.55,-5.69 | NEC-MPD78C14.P$32 v59.53,-5.72 | T1.3 -26.2,-12.6 -23.9,-10.45 -23.9,-3.7 L239D-2.15 -27.39,-3.7 -27.38,-0.36 L239D-2.13 | CON3.6 -51.18,27.68 -52.52,26.74 v-65.47,26.74 | NEC-MPD78C14.P$33 59.48,-2.15 63.34,-2.2 64.09,-3.59 64.33,-3.48 v64,-3.63
  pour Top: -29.87,3.92 -25.69,3.92 -25.71,1.38 -29.89,1.38 -29.89,1.41 -29.89,1.42
[CON5.9]=->BOTTOM_BLENDED_AIR_TEMP_SENSOR->MPD78C14.AN2
  Top 0.254: R24.2 55.77,27.5 58.56,27.49 R34.2
  Bottom 0.254: CON5.9 8.41,27.78 10.43,25.8 20.42,25.79 21.89,27.63 54.28,27.59 R24.2
[CON5.10]=RADIO(+12V)->MPD78C14.VDD(+5V)
  Top 0.254: CON5.10 10.82,27.84 11.46,27.48 17.24,27.47 R28.2
[CON5.12]=POWER_SUPPLIE(12V+)  (via drill 0.6)
  Top 0.254: CON5.12 15.8,29.9 14.46,33.49 v-67.57,33.46
  Bottom 0.254: v-67.57,33.46 -67.56,23.65 -66.15,22.85 -53.25,22.85 -52.2,22.1 -52.15,11.4 D2.A
CON5.7[BL].PASSENGER_COMPARTMENT_TEMP_SENSOR->MPD78C14.AN0  (via drill 0.6)
  Top 0.254: v66.79,31.81 69.21,29.9 69.2,19.93 68.53,18.69 68.5,4.24 69.37,3.06 R25.1 67.25,2.17 65.1,2.17 R26.2
  Bottom 0.254: CON5.7 5.04,31.85 v66.79,31.81
CON5.8[B].OUTSIDE_MIRROR_TEMP_SENSOR->MPD78C14.AN1  (via drill 0.6)
  Top 0.254: R7.2 v71.49,27.28 76.49,27.3 I1.2
  Bottom 0.254: CON5.8 5.8,27.77 8.84,25.07 15.19,25.06 16.22,23.99 21.39,23.96 23.24,26.29 60.62,26.29 62.3,27.32 v71.49,27.28
L239D.A1<-MPD78C14.PD0  (via drill 0.5 pad 0.25)
  Top 0.254: E$12.1 R17.1 -1,-5.3 -7.55,-5.3 -9.4,-8.25 -13.75,-8.25 v-14.7,-6.35 | L239D-1.2 -27.7,-2.45 -22.7,-2.45 -19.7,-5.05 -16.6,-5.05 -14.35,-9.15 -8.55,-9.15 -6.95,-6.45 D3.P$2 | R30.1 -15.4,14.3 v-15.95,11.6
  Bottom 0.254: D3.P$2 -0.9,-6.4 R17.1 | v-15.95,11.6 -15.9,-4 v-14.7,-6.35
L239D.A1<-MPD78C14.PD4  (via drill 0.5 pad 0.25)
  Top 0.254: L239D-2.2 -16.15,-3.75 -13.85,-5.3 -11.8,-5.3 -8.65,-4.1 D4.P$2 -2.55,-4.1 0,-0.35 R18.1 | R18.1 -1.25,2.55 v-7.95,2.55 | R18.1 E$11.1
  Bottom 0.254: R16.1 -8.45,14.65 -8.1,13.65 -8.1,11.4 -7.1,10.3 -7.1,3.25 v-7.95,2.55
L239D.A2<-MPD78C14.PD1  (via drill 0.5 pad 0.25)
  Top 0.254: L239D-1.7 -27.8,10.25 -24,10.2 -22.95,11.05 -20.5,11 -18.95,13.65 v-16.55,13.64 -16.55,14.55 -16.55,18.35 R31.2 | R29.1 -7,5.15 v-8.3,6.15
  Bottom 0.254: E$10.1 R29.1 -0.15,3.35 -3.05,0.25 -3.6,-1.35 D5.P$2 | v-8.3,6.15 -9.2,8.85 -9.2,11.4 -12.7,11.4 -15.1,13.65 v-16.55,13.64
L239D.A2<-MPD78C14.PD2
  Top 0.254: E$14.1 R27.1
  Bottom 0.254: R27.1 15.47,10.88 22.73,10.88 25.01,9.41 25,6.7 28.65,6.7 NEC-MPD78C14.P$57
L239D.A2<-MPD78C14.PD5  (via drill 0.5 pad 0.25, 0.6)
  Top 0.254: D6.P$2 -7.95,-2.4 v-20.4,-2.4 | E$13.1 6.5,11.8 1.4,11.8 R20.1 -0.85,8.95 v-0.85,7.4
  Bottom 0.254: v-20.4,-2.4 -20.4,7.65 L239D-2.7 | D6.P$2 -4.2,1.3 -1.75,3.75 -1.75,6.5 v-0.85,7.4 | R15.2 -10.35,19.75 -7.45,19.75 -1.7,14.65 -1.7,11.9 R20.1
L239D.A3<-MPD78C14.PD2  (via drill 0.5 pad 0.25)
  Top 0.254: D9.P$2 -4.6,10.6 -4.6,16.3 -3.65,17.6 5.35,17.55 8.05,19.7 E$14.2 13.65,19.7 R27.2
  Top 0.305: L239D-1.10 -39.35,8.15 -39.35,5.95 -38.4,5.15 v-21.55,5.12 -21.6,5.07 -9.3,5.05 -9.3,8.6 -7.65,9.15 D9.P$2 | I4.2 -21.55,21.05 v-21.55,12
  Bottom 0.305: v-21.55,12 v-21.55,5.12
L239D.A3<-MPD78C14.PD6  (via drill 0.5 pad 0.25)
  Top 0.254: R11.1 -13.05,13.7 -15.9,10.2 -21.95,10.2 -23.55,9 L239D-2.10 | v-8.1,7.85 D8.P$2 -4.45,6.55 -3.75,6.35 2.35,6.35 v3.45,5.5 | R14.1 E$8.1
  Bottom 0.254: R11.1 -13,14.35 -9.3,14.3 -8.65,13 -8.65,9.75 v-8.1,7.85 | v3.45,5.5 5.5,6.8 5.5,8.6 3.05,9.85 1.95,12.1 1.9,16.5 E$8.1
L239D.A4<-MPD78C14.PD3  (via drill 0.5 pad 0.25, 0.6)
  Top 0.254: I3.1 -23,16.35 v-22.55,17.55 | R19.1 E$9.1 | L239D-1.15 -34.07,-3.71 -32.65,0.11 -16.85,0.1 -14.15,2.5 -9.65,2.5 -8.7,3.85 D7.P$2 -0.9,3.85 -0.1,3.45 v2.5,3.45
  Bottom 0.254: v-22.55,17.55 -22.45,18.2 -20.9,18.95 -11.9,18.95 -11.9,21.9 -10.95,22.7 -7.55,22.7 -6.45,20.35 -1.25,16.15 R19.1 | v2.5,3.45 2.55,9.05 1.9,10.55 E$9.1
L4947_VOLTAGE_REG.DELAYCAP  (via drill 0.6)
  Top 0.254: -44.45,-26.5 U2.2 v-47.17,-26.38 | v-51.7,-16.9 v-51.7,-11.8 -52.8,-9.65 C2.+
  Bottom 0.254: v-47.17,-26.38 -48.31,-25.26 -48.3,-19.81 v-51.7,-16.9
L4947_VOLTAGE_REG.RESET(+5V)  (via drill 0.6)
  Top 0.254: U2.19 -52.57,-26.38 -50.7,-24.5 -50.7,-19.55 -49.05,-16.35 -49.05,-11.8 -46.01,-11.79 -46.02,-0.24 -46.02,-0.07 | -46.02,-0.07 v-46.01,9.72 | v-14,-26.1 v5,-26.1 5,-27.95 CON1.7 | v9.65,-17.05 10.55,-17.05 12.75,-14.4 v12.7,-13.35 | v51.77,-11.85 51.75,-13.09 51.75,-18.32 54.41,-18.32 NEC-MPD78C14.P$28 | L239D-1.1 -27.2,-4.95 -21.4,-4.95 -20.07,-6.23 L239D-2.1 | I6.1 -46.02,-0.07
  Bottom 0.254: v-46.01,9.72 -42.85,11.55 L239D-1.9 -34.95,10.35 -34.95,-4.14 -31.9,-6.2 L239D-1.1 | L239D-2.9 -23.7,11.5 -22.8,10.3 -22.8,-3.5 -20.05,-6.15 L239D-2.1 -17.3,-6.55 -16.35,-8.05 -15.1,-9.95 -15.15,-23.1 v-14,-26.1 | v5,-26.1 5.9,-23 v9.65,-17.05 | v12.7,-13.35 14.6,-11.85 v51.77,-11.85
L4947_VOLTAGE_REG.VIN  (via drill 0.6)
  Top 0.254: U2.17 -58.95,-23.8 -59.75,-22.55 -59.75,-14.85 v-58.6,-13.9 | v-52.8,-7.7 -52.8,-5.5 v-65.6,8.15
  Bottom 0.254: D1.C -59.45,18.75 -59.55,18.75 -59.65,14.95 -64.95,14.95 -65.6,13.96 v-65.6,8.15 -65.58,-10.61 C3.+ | v-58.6,-13.9 -56.85,-13.9 -55.75,-12.7 -52.8,-12.7 v-52.8,-7.7
L4947_VOLTAGE_REG.VOUT(+5V)  (via drill 0.6)
  Top 0.254: L239D-1.16 -36.7,-8.5 -26.35,-8.5 L239D-2.16 | v15.05,-23.76 -19.76,-23.75 | -19.76,-23.75 -33.52,-23.75 -34.53,-22.88 | -34.53,-22.88 -36.15,-21.35 v-36.15,-10.2 | R13.2 -6.11,-18.97 -17.5,-19 -19.75,-20.38 -19.76,-23.75 | v-50.39,-7.67 v-50.39,-16.12 | v-46.09,-25.12 U2.3 -36.6,-25.11 -34.53,-22.88
  Top 0.406: R9.1 R8.1 CON2.4
  Bottom 0.254: R9.1 v15.05,-23.76 | v-36.15,-10.2 -38.61,-9.65 -38.6,-7.45 L239D-1.16 | v-50.39,-16.12 -47.05,-19.03 -47.08,-23.91 -46.38,-24.69 v-46.09,-25.12 | I6.2 -50.36,-5.32 v-50.39,-7.67
L4947_VOLTAGE_REG.VOUT->MPD78C14.STOP  (via drill 0.6)
  Top 0.254: DZ3.P$1 47.08,26.89 48.94,26.89 DZ4.P$1 48.9,26.93 50.8,26.93 | R4.2 91.04,-6.81 88.88,-4.04 T3.1 81.51,18.24 79.35,18.24 77.65,19.25 I1.1 v76.44,23.78 | v62.47,23.83 57.83,23.83 55.5,26.91 50.8,26.93 | 50.8,26.93 DZ5.P$1
  Top 0.406: 42.5,14.05 43.99,15.34 43.98,27.44 46.99,27.45 47.06,27.45 47.06,28.56 DZ3.P$1
  Bottom 0.254: DZ1.P$1 78.6,26.8 77.67,26.8 | 77.67,26.8 76.77,26.8 DZ2.P$1 | v76.44,23.78 v62.47,23.83 | R26.1 71.33,0.64 73.91,0.64 85.29,0.64 86.95,0.63 T3.1 | I1.1 77.67,26.8
LM2904.1OUT
  Top 0.254: R33.2 85.45,-27.21 83.18,-27.8 LM2904.1
MPD78C14.AN0
  Top 0.254: R25.2 62.07,2.04 58.17,1.99 NEC-MPD78C14.P$34 60.9,3.25 62.05,4.55 C11.+
MPD78C14.AN1  (via drill 0.6)
  Top 0.254: R7.1 72.74,20.14 72.75,12.88 v71.93,11.8
  Bottom 0.254: C7.+ 62.1,11.8 63.75,11.8 | 63.75,11.8 v71.93,11.8 | R7.1 73.8,21.25 DZ2.P$2 | NEC-MPD78C14.P$35 56.94,7.51 58.85,9.6 63.8,9.6 63.75,11.8
MPD78C14.AN2  (via drill 0.6)
  Top 0.254: v70.56,17.81 71.69,16.93 71.69,14.36 C9.+ | R24.1 55.54,19.35 55.55,8.81 55.68,7.47 NEC-MPD78C14.P$36
  Bottom 0.254: R24.1 DZ6.P$2 57.13,19.98 59.3,17.81 v70.56,17.81
MPD78C14.AN3  (via drill 0.6)
  Top 0.254: v59.72,22.89 60.4,22.28 60.39,17.35 C6.+
  Bottom 0.254: DZ5.P$2 R23.1 54.7,22.86 v59.72,22.89 | C6.+ 57.76,10.52 55.83,8.74 54.41,7.33 NEC-MPD78C14.P$37
MPD78C14.AN4
  Top 0.254: DZ7.P$2 70.32,22.57 76.32,22.57 76.32,18.73 76.35,18.1 76.32,14.44 C10.+ 74.87,4.52 | R38.1 86.17,-3.31 86.22,2.51 83.09,4.57 74.87,4.52 | NEC-MPD78C14.P$38 53.12,0.58 54.66,-0.84 70.48,-0.84 74.4,4.57 74.87,4.52
  Bottom 0.254: R37.1 DZ7.P$2
MPD78C14.AN5
  Top 0.254: DZ8.P$2 63.62,23.02 64.64,23.02 64.65,15.54 C8.+
  Bottom 0.254: R35.1 61.4,21.25 DZ8.P$2 | C8.+ 64.61,15.54 63.35,17.1 56.41,17.1 55.49,16.02 55.49,10.98 51.87,7.36 NEC-MPD78C14.P$39
MPD78C14.AN6  (via drill 0.6)
  Top 0.254: C4.+ 49.19,8.43 50.75,6.61 53.17,6.61 53.16,4.34 50.59,4.34 NEC-MPD78C14.P$40 | v16.42,11.83 13.36,9.06 v13.35,6.78 | v3.9,-19.79 -11.57,-19.86 -13.12,-21.45 v-17.79,-21.46
  Bottom 0.254: C4.+ 49.19,8.28 35.86,8.25 33.82,6.75 30.16,6.76 29.49,7.46 26.15,7.46 26.14,9.93 23.19,11.83 v16.42,11.83 | v13.35,6.78 10.55,4.96 10.54,-7.25 9.09,-7.24 5.4,-9.84 5.43,-17.53 v3.9,-19.79 | I5.2 -53.76,3.95 -42.63,3.94 -40.66,1.74 -40.66,-18.44 -38.03,-21.47 v-17.79,-21.46
MPD78C14.AN7
  Top 0.254: R21.1 46.02,15.28 46.02,24.54 48.93,24.54 | C5.+ 51.82,15.01 51.82,23.71 51.03,24.54 48.93,24.54 | NEC-MPD78C14.P$41 49.35,6.45 47.87,8.25 47.86,19.41 48.91,20.11 DZ4.P$2 48.93,24.54
MPD78C14.PB3->MC74HC04A.A5  (via drill 0.6)
  Top 0.254: NEC-MPD78C14.P$12 v34.07,-10.89 | v56.67,-7.59 75.43,-7.6 75.41,-8.83 MC74HC04A.11
  Bottom 0.254: v34.07,-10.89 55.58,-10.9 v56.67,-7.59
MPD78C14.PB4->MC74HC04A.A6  (via drill 0.6)
  Top 0.254: MC74HC04A.13 69.86,-13.89 68.61,-15.05 v58.38,-15.05
  Bottom 0.254: NEC-MPD78C14.P$13 35.37,-15.02 v58.38,-15.05
MPD78C14.PB5->MC74HC04A.A2  (via drill 0.6)
  Top 0.254: NEC-MPD78C14.P$14 37.84,-19.35 37.85,-18.38 39.28,-18.37 v39.27,-13.3 | v48.38,-13.29 50.9,-10.86 55.37,-10.86 58.37,-12.69 78.19,-12.7 MC74HC04A.3
  Bottom 0.254: v39.27,-13.3 v48.38,-13.29
MPD78C14.PB6->MC74HC04A.A1  (via drill 0.6)
  Top 0.254: MC74HC04A.1 79.25,-17.87 65.72,-17.87 64.47,-17.87 v62.33,-21.31
  Bottom 0.254: v62.33,-21.31 37.91,-21.31 NEC-MPD78C14.P$15
MPD78C14.PB7->MC74HC04A.A4  (via drill 0.6)
  Top 0.254: v76.13,-14.65 74.17,-15.32 70.55,-15.32 68.99,-16.8 63.67,-16.8 v62.29,-19.08
  Bottom 0.254: MC74HC04A.9 75.11,-3.71 76.18,-5.45 v76.13,-14.65 | v62.29,-19.08 61.35,-20.64 39.16,-20.64 NEC-MPD78C14.P$16
MPD78C14.PC4->NPN_LCD_SPEED_BULB.BASE  (via drill 0.6)
  Top 0.254: R1.2 -10.25,-15.6 -10.05,-15.95 6.05,-15.95 7.1,-14.55 v8.95,-14.55 | v45.57,-9.82 NEC-MPD78C14.P$21
  Bottom 0.254: v8.95,-14.55 8.95,-10.75 10.14,-9.87 v45.57,-9.82
MPD78C14.PD0->L239D.A1
  Top 0.254: E$12.2 R17.2 6.6,-4.05 6.6,-0.1 7.6,1.55 12.65,1.55 15.25,-2.3 31.55,-2.3 NEC-MPD78C14.P$55
MPD78C14.PD1->L239D.A2
  Top 0.254: E$10.2 R29.2 6.85,3.85 13.7,3.85 16.05,-0.5 30.28,-0.5 NEC-MPD78C14.P$56
MPD78C14.PD3->L239D.A4
  Top 0.254: NEC-MPD78C14.P$58 27.74,8.45 26.87,9.24 26.87,19.29 24.25,19.25 24.25,21.9 23.7,22.92 22.34,22.92 21.75,22.1 21.75,19.6 20.16,18.31 7.75,18.3 R19.2 E$9.2
MPD78C14.PD4->L239D.A1  (via drill 0.5 pad 0.25)
  Top 0.254: v26.45,-1.4 15.6,-1.4 13.2,2.6 7,2.6 R18.2 E$11.2
  Bottom 0.254: v26.45,-1.4 NEC-MPD78C14.P$59
MPD78C14.PD5->L239D.A2
  Top 0.254: NEC-MPD78C14.P$60 25.2,0.43 17,0.43 14.49,4.87 11.14,4.87 E$13.2 8.9,9.8 6.1,9.8 R20.2
MPD78C14.PD6->L239D.A3
  Bottom 0.254: NEC-MPD78C14.P$61 23.89,8.89 22.36,9.85 14.1,9.85 12.4,15.15 12.4,21.35 R14.2 E$8.2
MPD78C14.PD7->NPN_LCD_TEMP_BULB.BASE  (via drill 0.6)
  Top 0.254: R2.2 -3.55,-11.85 v7.95,-11.85
  Bottom 0.254: v7.95,-11.85 7.95,-10.7 9.9,-9.3 12.25,-9.3 12.25,-5.05 14.85,-3.1 21.4,-3.1 22.65,-1.9 NEC-MPD78C14.P$62
MPD78C14.VDD(+5V)->MC74HC04A.A3
  Top 0.254: MC74HC04A.5 77.47,-6.31 77.48,-10.14 R39.1
MPD78C14.VDD(+5V)<-RADIO(+12V)
  Top 0.254: R32.1 25.6,14 25.15,11.39 25.15,4.4 20.11,4.4 NEC-MPD78C14.P$64
MPD78C14.X1  (via drill 0.6)
  Top 0.254: NEC-MPD78C14.P$30 56.97,-18.38 55.64,-18.39 55.64,-21.54 v54.5,-22.25
  Bottom 0.254: v54.5,-22.25 54.5,-24.7 53.5,-25.75 Q1.3
MPD78C14.X2  (via drill 0.6)
  Top 0.254: NEC-MPD78C14.P$31 58.22,-22.23 57.75,-23.25 v53,-23.25
  Bottom 0.254: v53,-23.25 49.5,-23.25 47.75,-24.5 Q1.1
NPN_BRIGHT_CTL.COLLECTOR(LUZ_PPL_V+)  (via drill 0.6)
  Top 0.254: T3.3 91.94,0.64 v91.93,-2.71
  Bottom 0.254: v91.93,-2.71 90.71,-4.18 90.74,-8.18 91.69,-9.32 R3.2
NPN_LCD_SPEED_BULB.BASE
  Bottom 0.254: T1.1 -29.75,-15.25 -28.8,-15.25 -27.55,-15.6 R1.1
NPN_LCD_TEMP_BULB.BASE  (via drill 0.6)
  Top 0.254: v11.65,-11.97 10,-11.95 9.18,-10.64 -8.75,-10.7 -9.55,-11.45 -11.95,-11.45 R2.1
  Bottom 0.254: T2.1 12.1,-17.35 11.65,-14.85 v11.65,-11.97
PC1/RXD  (via drill 0.6)
  Top 0.254: v37.15,-23.7 38.65,-23.7 41.7,-20.5 NEC-MPD78C14.P$18
  Bottom 0.254: R9.2 v37.15,-23.7
PC3/INT2  (via drill 0.6)
  Top 0.254: v42.7,-23 44.25,-21 NEC-MPD78C14.P$20
  Bottom 0.254: R8.2 40.1,-26.25 v42.7,-23
RADIO(+12V)->MPD78C14.VDD(+5V)
  Top 0.254: DZ10.P$1 23,19.45 20.35,17.6 R28.1
  Bottom 0.254: DZ9.P$1 R32.2 DZ10.P$1
RADIO(+12V)->MPD78C14.VDD(+5V)->MPD78C14.STOP
  Top 0.406: DZ10.P$2 21.38,8.07 NEC-MPD78C14.P$63
  Bottom 0.254: MC74HC04A.14 69.26,-16.44 66.26,-10.14 R39.2 63.79,-6.17 61.56,-3.16 54.3,-3.2 25.24,-3.17 23.99,-1.97 23.99,4.32 21.29,4.32 NEC-MPD78C14.P$63
S$4
  Top 0.254: T3.2 90.11,5.28 R6.1
  Bottom 0.254: R5.1 R6.1 DZ1.P$2
S$7
  Bottom 0.254: C1.+ -62.7,13.66 -57.15,13.63 | -57.15,13.63 D1.A | D2.C -57.15,13.63
S$8
  Bottom 0.254: I5.1 -44.85,2.23 -43.28,0.74 -43.28,-3.19 E$1.1
S$10
  Bottom 0.254: D9.P$1 D8.P$1 D7.P$1 D6.P$1 D5.P$1 D4.P$1 D3.P$1 -12.85,-10.25 -14.15,-11 -14.15,-15.6 R13.1
S$28
  Bottom 0.254: R10.2 I2.2